# Altium PCB MB1364.PcbDoc (part 3 of 3)
Units mm, origin at the board's own origin, x right, y up, seen from the top; angles counter-clockwise.
Board outline 70 x 133.34 mm, 4 copper layers (Top Layer, Signal Layer 1, Signal Layer 3, Bottom Layer), stack 1.501 mm thick; 93 components, 195 nets, 473 pads, 282 vias.
Unrouted connection lines stored in the file: 23.
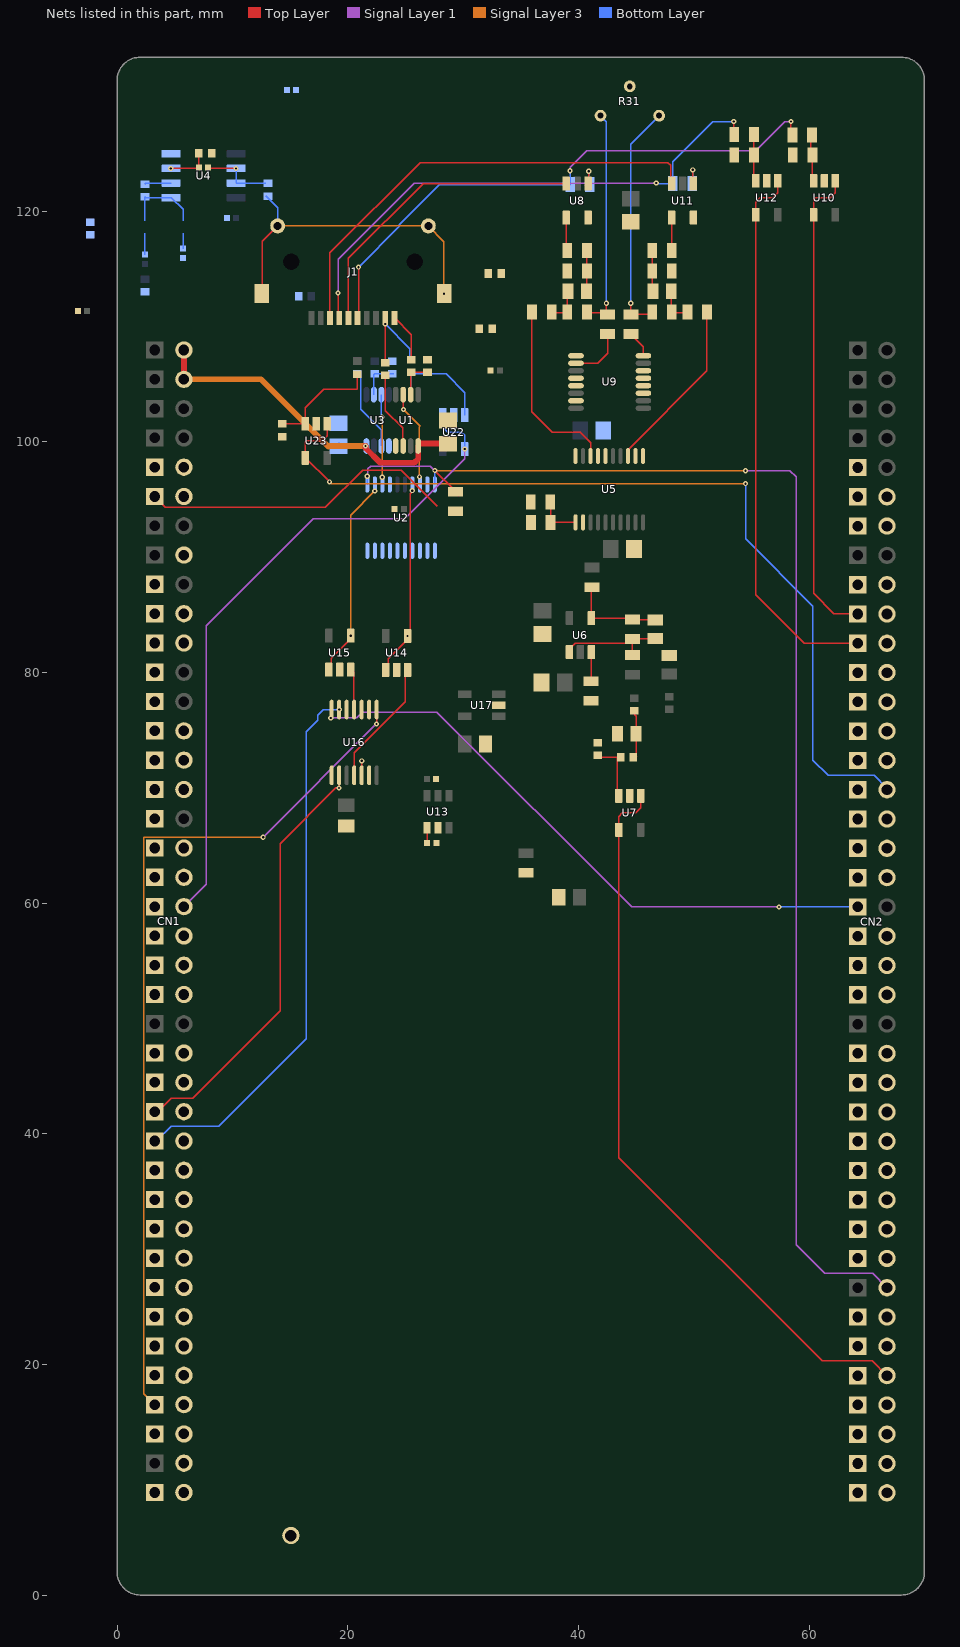
[diagram p4: the nets of this part, all layers, seen from the top]

## Via types
v1: diameter 0.45, hole 0.2, Top Layer to Bottom Layer, tented both sides, 280 vias
v2: diameter 1.27, hole 0.711, Top Layer to Bottom Layer, 1 vias
v3: diameter 0.45, hole 0.2, Top Layer to Bottom Layer, 1 vias

## Nets (pads, with @x,y where several pads share a name; then routed paths per layer and width w, separated by ;. In a path a pad name is that pad's centre, name@x,y a point inside that pad or via, vN(x,y) a via of type N, cw(c..) or ccw(c..) an arc to the next point about the centre after c; other vN are vias at no path point) (continued)
"Bottom In": U2.12 U15.1 U15.4 | length 17.2
  Top Layer w0.12: U15.1@18.354,80.237 18.57,80.453 18.57,81.228 20.254,82.912 v1(20.254,83.187)
  Signal Layer 3 w0.12: v1@20.233,83.187 20.233,93.635 v1(22.331,95.733)
"Bottom Sense Plate Force": J1.7 R37.1 R39.2 | length 46.7
  Top Layer w0.12: v1(19.156,112.903) 19.156,110.821 J1.7@19.249,110.728 ; v1(53.467,127.762) 53.467,126.658 R39.2@53.506,126.619
  Signal Layer 1 w0.12: v1(19.156,112.903) 19.156,115.803 25.781,122.428 v1(46.736,122.428)
  Bottom Layer w0.12: v1(46.736,122.428) 46.785,122.379 R37.1@48.172,122.379 48.172,124.296 51.638,127.762 v1(53.467,127.762)
"Bottom Sense Plate Sense": J1.8 U11.3 | length 40.2
  Top Layer w0.12: J1.8@18.449,110.728 18.449,116.387 26.268,124.206 47.752,124.206 48.006,123.952 48.006,122.445 U11.3@48.072,122.379
Bottom_In: R36.1 U5.3 | length 15.3
  Top Layer w0.12: U5.3@44.297,98.76 44.297,99.288 51.142,106.133 R36.1@51.142,111.252
DAC0_OUT: U14.3 U16.4 | length 11.1
  Top Layer w0.12: U16.4@20.549,71.078 20.549,73.024 24.965,77.441 24.965,79.995 U14.3@25.182,80.211
DAC1_OUT: U15.3 U16.11 | length 3.6
  Top Layer w0.12: U15.3@20.254,80.237 20.299,80.237 20.509,80.026 20.509,76.817 U16.11@20.549,76.778
DAC2_OUT: U16.5 | length 1.3
  Top Layer w0.12: U16.5@21.199,71.078 21.204,71.083 21.204,72.322 v1(21.209,72.328)
DAC3_OUT: U16.10
GND: C1.2 C2.1 C3.2 C4.1 C7.1 C7.2 C8.1 C10.2 C11.1 C12.2 C13.1 C14.1 C15.1 C18.1 C19.2 C20.1 C21.1 C22.1 C23.1 C25.1 C26.1 CN1.16 CN1.27 CN1.28 CN1.30 CN1.59 CN1.70 CN2.17 CN2.28 CN2.49 CN2.64 CN2.73 R1.1 R4.1 R5.2 R12.2 R13.2 R14.1 R23.1 R24.1 R31.2 R32.1 R33.1 R40.1 R41.1 R43.1 R45.1 TP2.1 U1.5 U2.1 U2.2 U2.3 U2.4 U2.5 U2.6 U2.7 U2.8 U2.9 U2.10 U2.14 U2.19 U3.5 U4.4 U5.2 U5.6 U5.7 U5.12 U7.2 U8.5 U9.5 U9.6 U9.9 U10.2 U11.5 U12.2 U13.2 U14.2 U15.2 U16.1 U16.6 U16.12 U17.2 U22.2 U23.2
Guard: J1.11 J1.12 J1.13 J1.14 R9.1 | length 29
  Top Layer w0.12: J1.12@12.544,112.838 12.573,112.867 12.573,117.367 J1.14@13.919,118.713
  Signal Layer 3 w0.12: J1.14@13.919,118.713 J1.13@26.979,118.713 28.333,117.359 v1(28.333,112.838)
  Bottom Layer w0.12: R9.1@12.903,121.319 13.919,120.303 J1.14@13.919,118.713
IOREF: CN1.20
NetC5_1: C5.1 R8.1 U4.1 | length 8.7
  Bottom Layer w0.12: C5.1@2.413,116.224 2.413,118.068 ; 2.413,119.168 R8.1@2.413,121.243 2.498,121.158 U4.1@4.668,121.158 4.699,121.158 5.715,120.142 5.715,119.168
NetC6_1: C6.1 R9.2 U4.6 U4.7 | length 6.3
  Top Layer w0.12: C6.1@7.893,123.563 7.999,123.669 8.028,123.698 v1(10.297,123.698)
  Bottom Layer w0.12: U4.6@10.318,123.698 U4.7@10.318,122.428 12.894,122.428 R9.2@12.903,122.419
NetC6_2: C6.2 R13.1 U4.3 | length 4
  Top Layer w0.12: v1(4.647,123.698) 6.958,123.698 7.093,123.563 7.095,123.565 R13.1@7.095,125.019
NetC8_2: C8.2 R10.1 | length 1.3
  Bottom Layer w0.12: C8.2@5.715,116.732 5.715,118.068
NetC9_1: C9.1 R15.2 R17.1 U6.4 | length 8.3
  Top Layer w0.12: R17.1@41.165,87.381 41.115,87.331 U6.4@41.115,84.706 44.54,84.706 R15.2@44.665,84.581 46.615,84.581 C9.1@46.665,84.531
NetC9_2: C9.2 R15.1 R18.2 U6.1 | length 9.5
  Top Layer w0.12: U6.1@39.215,81.756 39.215,82.031 39.72,82.536 44.32,82.536 R15.1@44.665,82.881 ; R18.2@44.704,81.495 44.665,81.534 R15.1@44.665,82.881 ; C9.2@46.665,82.931 44.715,82.931 R15.1@44.665,82.881
NetC11_2: C11.2 R19.1 R21.2 | length 3.8
  Top Layer w0.12: R19.1@44.831,76.366 44.996,76.201 C11.2@44.996,74.676 44.996,72.694 R21.2@45.046,72.644
NetC16_1: C16.1 R29.2 R32.2 | length 3.6
  Top Layer w0.12: C16.1@40.678,113.03 40.728,113.08 R32.2@40.728,114.808 R29.2@40.728,116.586
NetC16_2: C16.2 R25.1 R27.2 | length 3.1
  Top Layer w0.12: R25.1@37.884,111.181 39.184,111.181 39.034,111.331 C16.2@39.034,112.881
NetC17_1: C17.1 R38.2 R40.2 | length 3.6
  Top Layer w0.12: R38.2@46.394,116.586 R40.2@46.394,114.808 46.394,113.08 C17.1@46.444,113.03
NetC17_2: C17.2 R35.1 R36.2 | length 3.4
  Top Layer w0.12: C17.2@48.044,113.03 48.044,111.302 R35.1@48.094,111.252 48.094,111.181 49.184,111.181 R36.2@49.53,111.527
NetC19_1: C19.1 U13.1 | length 1.3
  Top Layer w0.12: U13.1@26.868,66.537 26.868,65.217 C19.1@26.88,65.205
NetLabel209: 
NetLabel213: U9.12
NetLabel214: U9.15
NetLabel215: U9.13
NetR1_2: R1.2 R2.1 U1.2 | length 3.3
  Top Layer w0.12: U1.2@25.45,104.079 25.45,105.947 R2.1@25.506,106.003 R1.2@26.903,106.003
NetR3_1: R3.1 U1.6 | length 6.8
  Top Layer w0.12: R3.1@23.255,105.749 23.255,102.682 24.744,101.193 24.744,99.685 U1.6@24.8,99.629
NetR4_2: R4.2 R6.1 U3.2 | length 3.5
  Bottom Layer w0.12: U3.2@22.26,104.079 22.26,105.805 R6.1@22.331,105.876 R4.2@23.855,105.876 R4.2@23.982,105.876
NetR7_1: R7.1 U3.6 | length 7.4
  Bottom Layer w0.12: R7.1@20.604,105.918 20.84,105.918 21.122,105.636 21.122,102.817 22.91,101.029 U3.6@22.91,99.629
NetR8_2: R8.2 R10.2 U4.2 | length 2.3
  Bottom Layer w0.12: R8.2@2.413,122.343 2.498,122.428 U4.2@4.668,122.428
NetR11_1: R11.1 R43.2 U22.3 | length 8.5
  Bottom Layer w0.12: 25.45,104.629 25.455,104.634 25.455,105.876 28.52,105.876 30.131,104.265 U22.3@30.131,102.313
NetR21_1: R21.1 R24.2 U7.3 | length 5.3
  Top Layer w0.12: R24.2@41.49,72.644 43.346,72.644 43.346,69.447 U7.3@43.5,69.293
NetR23_2: R23.2 U6.3 | length 2.6
  Top Layer w0.12: R23.2@41.08,79.407 R23.2@41.18,79.307 ; R23.2@41.115,79.331 U6.3@41.115,81.756
NetR26_2: R26.2 U8.1 | length 2.5
  Top Layer w0.12: U8.1@40.828,122.379 40.894,122.445 v1(40.894,123.454)
  Bottom Layer w0.12: R26.2@40.601,122.174 40.855,122.428 40.894,122.467 v1(40.894,123.454)
NetR27_1: R27.1 R30.1 R31.1 | length 19
  Top Layer w0.12: R27.1@40.884,111.181 R30.1@42.384,111.181 ; v1(42.418,112.014) 42.418,111.147 R30.1@42.534,111.031
  Bottom Layer w0.12: R31.1@41.91,128.27 42.418,127.762 v1(42.418,112.014)
NetR28_1: R28.1 R33.2 U10.3 | length 4.2
  Top Layer w0.12: R28.1@60.261,126.594 60.159,126.619 60.159,124.968 R33.2@60.286,124.841 60.286,122.717 U10.3@60.379,122.624
NetR29_1: R29.1 U8.4 | length 2.9
  Top Layer w0.12: U8.4@38.928,119.429 38.928,116.686 R29.1@39.028,116.586
NetR30_2: R30.2 U9.10 | length 4.8
  Top Layer w0.12: U9.10@39.784,106.806 41.659,106.806 42.534,107.681 R30.2@42.534,109.331
NetR31_3: R31.3 R34.1 R35.2 | length 20
  Top Layer w0.12: v1(44.534,112.014) R34.1@44.534,111.031 46.034,111.031 R35.2@46.184,111.181
  Bottom Layer w0.12: v1(44.534,112.014) 44.534,125.814 R31.3@46.99,128.27
NetR34_2: R34.2 U9.8 | length 2.3
  Top Layer w0.12: R34.2@44.534,109.331 45.634,108.231 U9.8@45.634,107.456
NetR37_2: R37.2 U11.1 | length 2.4
  Top Layer w0.12: v1(49.911,123.571) 49.911,122.44 U11.1@49.972,122.379
  Bottom Layer w0.12: R37.2@49.872,122.379 49.911,122.418 v1(49.911,123.571)
NetR38_1: R38.1 U11.4 | length 2.9
  Top Layer w0.12: U11.4@48.072,119.429 48.072,116.608 R38.1@48.094,116.586
NetR39_1: R39.1 R41.2 U12.3 | length 4.1
  Top Layer w0.12: R39.1@55.206,126.619 R41.2@55.206,124.841 55.206,122.797 U12.3@55.379,122.624
NetR42_1: R42.1 U16.9
NetR44_1: R44.1 R45.2 U23.3 | length 9.9
  Top Layer w0.12: R45.2@14.3,101.54 14.311,101.551 U23.3@16.301,101.551 16.301,102.936 17.928,104.563 20.807,104.563 R44.1@20.807,105.901
NetU1_3: U1.3 U2.18 | length 7.8
  Top Layer w0.12: U1.3@24.8,104.079 24.8,102.814 v1(24.82,102.794)
  Signal Layer 3 w0.12: v1(24.82,102.794) 26.268,101.346 26.213,101.291 v1(26.213,96.952)
NetU2_13: U2.13 U3.3 | length 7.2
  Signal Layer 3 w0.12: v1(22.966,102.133) 22.987,102.112 v1(22.987,96.926)
  Bottom Layer w0.12: U3.3@22.91,104.079 22.91,102.189 v1(22.966,102.133)
NRST: CN1.22
PA0: CN1.36
PA1: CN1.38
PA2: CN2.43
PA3: CN2.45
PA4: CN1.40 U22.1 U22.4 | length 58.8
  Signal Layer 1 w0.12: CN1.40@5.786,59.689 7.735,61.638 7.735,84.062 11.151,87.478 16.993,93.32 24.943,93.32 30.131,98.508 v1(30.131,99.363)
  Bottom Layer w0.12: U22.1@28.231,102.313 28.231,101.288 28.681,100.838 29.849,100.838 30.131,100.556 v1(30.131,99.363)
PA5: CN2.19 U10.1 U10.4 | length 41.9
  Top Layer w0.12: U10.1@62.279,122.624 62.279,121.599 61.838,121.158 60.579,121.158 60.379,120.958 U10.4@60.379,119.674 60.379,86.839 62.155,85.064 CN2.19@64.206,85.064
PA6: CN2.21 U12.1 U12.4 | length 47.9
  Top Layer w0.12: U12.1@57.279,122.624 57.279,121.599 56.829,121.149 55.744,121.149 55.379,120.784 U12.4@55.379,119.674 55.379,86.734 59.589,82.524 CN2.21@64.206,82.524
PA7: CN2.23
PA8: CN2.31
PA9: CN2.29
PA10: CN2.41
PA11: CN2.22
PA12: CN2.20
PA13: CN1.21
PA14: CN1.23
PA15: CN1.25
PB0: CN1.42
PB1: CN2.32 U23.1 U23.4 | length 77.6
  Top Layer w0.12: U23.4@16.301,98.601 16.301,99.939 16.438,100.076 17.751,100.076 18.201,100.526 U23.1@18.201,101.551 ; U23.4@16.322,98.613 v1(18.415,96.52)
  Signal Layer 3 w0.12: v1(18.415,96.52) 18.567,96.368 v1(54.483,96.368)
  Bottom Layer w0.12: v1(54.483,96.368) 54.483,91.567 60.325,85.725 60.325,72.39 61.646,71.069 65.634,71.069 66.746,69.957 CN2.32@66.746,69.824
PB2: CN2.30
PB3: CN2.39 U16.14 | length 52.9
  Signal Layer 1 w0.12: v1(18.517,76.048) 20.777,76.048 21.285,76.556 27.711,76.556 44.603,59.664 v1(57.379,59.664)
  Bottom Layer w0.12: v1(57.379,59.664) CN2.39@64.206,59.664
PB4: CN2.35
PB5: CN2.37
PB6: CN2.25
PB7: CN1.29
PB8: CN2.11
PB9: CN2.13
PB10: CN2.33
PB11: CN2.26
PB12: CN2.24
PB13: CN2.38
PB14: CN2.36
PB15: CN2.34
PC0: CN1.46
PC1: CN1.44
PC2: CN1.43
PC2_C: U9.4
PC3: CN1.45
PC3_C: U9.3
PC4: CN2.42
PC5: CN2.14
PC6: CN2.12
PC7: CN2.27
PC9: CN2.9
PC10: CN1.9
PC11: CN1.10
PC12: CN1.11 | length 27.5
  Top Layer w0.12: CN1.11@3.246,95.249 4.19,94.305 18.047,94.305 21.273,97.531 24.626,97.531 27.75,94.407
PC13: CN1.31
PC14: CN1.33
PC15: CN1.35
PD0: CN1.67
PD1: CN1.65
PD2: CN1.12
PD3: CN1.50
PD4: CN1.49
PD5: CN1.51
PD6: CN1.53 U16.2 | length 37.2
  Top Layer w0.12: CN1.53@3.246,41.909 3.529,41.909 4.699,43.078 6.553,43.078 14.122,50.648 14.122,65.151 18.949,69.978 v1(19.228,69.978) 19.249,69.998 U16.2@19.249,71.078
PD7: CN1.55 U16.13 | length 47.4
  Bottom Layer w0.12: CN1.55@3.246,39.369 3.402,39.369 4.674,40.64 8.788,40.64 16.383,48.235 16.383,74.854 17.374,75.844 17.374,76.302 17.85,76.778 v1(19.249,76.778)
PD8: CN2.18
PD9: CN1.79
PD10: CN2.75
PD11: CN2.55
PD12: CN2.53
PD13: CN2.51
PD14: CN2.56
PD15: CN2.58
PE0: CN2.74
PE1: CN1.71
PE2: CN1.56
PE3: CN1.57
PE4: CN1.58
PE5: CN1.60
PE6: CN1.72
PE7: CN2.54
PE8: CN2.50
PE9: CN2.62 R20.1
PE10: CN2.57
PE11: CN2.66 R22.1
PE12: CN2.59
PE13: CN2.65
PE13: R5.1 U2.11 U2.20 | length 119.3
  Top Layer w0.12: v1(27.548,97.502) 29.316,95.734 R5.1@29.316,95.668 R5.1@29.681,95.303
  Signal Layer 1 w0.12: v1(21.692,97.003) 21.747,97.058 21.747,97.663 21.975,97.892 27.158,97.892 v1(27.548,97.502) ; v1(54.483,97.485) 58.311,97.485 58.327,97.502 58.877,96.952 58.877,30.353 61.341,27.889 65.501,27.889 66.746,26.644
  Signal Layer 3 w0.12: v1(27.548,97.502) 27.565,97.485 v1(54.483,97.485)
  Bottom Layer w0.12: v1(21.692,97.003) 21.692,96.325 U2.11@21.706,96.31 ; U2.20@27.548,96.302 v1(27.548,97.502)
PE14: CN2.61
PE15: CN2.63
PF0: CN1.63
PF1: CN1.61
PF2: CN1.62
PF3: CN2.68
PF4: CN2.46
PF5: CN2.44
PF6: CN1.17
PF7: CN1.19
PF8: CN1.64
PF9: CN1.66
PF10: CN2.52
PF11: CN2.72 U7.1 U7.4 | length 63.9
  Top Layer w0.12: U7.1@45.4,69.293 45.4,68.268 44.95,67.818 43.815,67.818 43.5,67.503 U7.4@43.5,66.343 43.5,37.932 61.138,20.295 65.481,20.295 66.746,19.03 CN2.72@66.746,19.024
PF12: CN2.69
PF13: CN2.67
PF14: CN2.60
PF15: CN2.70
PG0: CN1.69
PG1: CN1.68
PG2: CN1.52
PG3: CN1.54
PG4: CN2.79
PG5: CN2.78
PG6: CN2.80
PG7: CN2.77
PG8: CN2.76
PG9: CN1.73 U16.8 | length 75.1
  Top Layer w0.12: v1(22.479,75.528) 22.489,75.537 22.489,76.768 U16.8@22.499,76.778
  Signal Layer 1 w0.12: v3(12.656,65.705) v1(22.479,75.528)
  Signal Layer 3 w0.12: CN1.73@3.246,16.509 2.299,17.455 2.299,65.705 v3(12.656,65.705)
PG10: CN1.76
PG11: CN1.80
PG12: CN1.75
PG13: CN1.78
PG14: CN2.71
PG15: CN1.74
PH0: CN1.37
PH1: CN1.39
PWM65KHz: R20.2 R22.2 U5.1 U5.10 U5.11 | length 3.8
  Top Layer w0.12: R20.2@37.578,94.59 R22.2@37.578,92.989 37.599,93.01 U5.11@39.747,93.01
"Top Force Plate Force": J1.2 R3.2 R11.2 | length 8.6
  Top Layer w0.12: v1(23.249,110.211) J1.2@23.249,110.728 23.255,110.722 R3.2@23.255,106.849
  Bottom Layer w0.12: v1(23.249,110.211) 25.379,108.081 25.379,106.976 25.455,106.976
"Top Force Plate Sense": J1.1 R2.2 | length 4.2
  Top Layer w0.12: J1.1@24.049,110.728 25.506,109.271 R2.2@25.506,107.103
"Top In": U2.17 U14.1 U14.4 | length 16.5
  Top Layer w0.12: U14.1@23.282,80.211 23.498,80.428 23.498,81.203 25.182,82.886 v1(25.182,83.161) 25.403,83.383 25.403,95.49 25.582,95.669 v1(25.582,95.758)
"Top Sense Plate Force": J1.5 R26.1 R28.2 | length 49.3
  Top Layer w0.12: J1.5@20.849,110.728 20.93,110.809 v1(20.93,115.138) ; R28.2@58.42,126.658 v1(58.42,127.762)
  Signal Layer 1 w0.12: v1(39.268,123.495) 39.268,123.798 40.706,125.235 55.35,125.235 57.877,127.762 v1(58.42,127.762)
  Bottom Layer w0.12: v1(20.93,115.138) 24.466,118.675 24.466,118.827 27.94,122.301 R26.1@39.282,122.301 39.268,122.315 v1(39.268,123.495)
"Top Sense Plate Sense": J1.6 U8.3 | length 26.7
  Top Layer w0.12: J1.6@20.049,110.728 20.049,115.907 26.521,122.379 U8.3@38.928,122.379
Top_In: R25.2 U5.8 | length 16
  Top Layer w0.12: R25.2@35.98,111.252 35.941,111.213 35.941,102.616 37.719,100.838 40.132,100.838 41.047,99.923 U5.8@41.047,98.76
VBAT: CN1.41
VIN: CN1.32
ZSupply: C1.1 C3.1 CN1.2 CN1.4 U1.8 U3.8 | length 32.6
  Top Layer w0.12: U1.8@26.1,99.629 U1.8@26.309,99.838
  Top Layer w0.5: CN1.4@5.786,105.409 CN1.2@5.786,107.949 ; v1(21.539,99.629) 21.539,99.445 22.814,98.171 25.76,98.171 26.1,98.511 U1.8@26.1,99.629 ; U1.8@26.309,99.838 C1.1@28.681,99.838 C1.1@28.681,99.538
  Signal Layer 3 w0.5: CN1.4@5.786,105.409 12.473,105.409 18.313,99.568 ; 18.374,99.629 v1(21.539,99.629)
  Bottom Layer w0.12: U3.8@21.387,99.629 v1(21.539,99.629) U3.8@21.61,99.629
  Bottom Layer w0.5: C3.1@19.181,99.609 19.24,99.665 21.177,99.629 U3.8@21.387,99.629
pads on no net: CN1.18 CN1.34 CN1.47 CN1.48 CN1.77 CN2.10 CN2.15 CN2.47 CN2.48 J1.9 J1.15 J1.16 U1.1 U1.4 U1.7 U2.15 U3.1 U3.4 U3.7 U5.15 U5.17 U5.18 U5.19 U5.20 U9.1 U9.2 U9.7 U9.14 U9.16
copper on no net: | length 1692.4
  Top Layer w0.12: 18.676,73.653 19.149,73.653 19.174,73.678 ; 35.853,94.793 35.853,96.178 38.435,98.76 39.747,98.76 39.747,97.032 39.817,96.962 45.146,96.962 45.597,97.413 45.597,98.76 47.38,96.977 53.467,90.89 53.467,70.104 61.341,62.23 61.341,33.934 62.179,33.096 65.126,33.096 66.498,31.724 66.746,31.724
  Top Layer w0.45: v1(14.328,0.629) v1(12.591,0.629) v1(10.866,0.629) v1(9.104,0.629) v1(7.366,0.629) v1(5.641,0.629) v1(3.828,0.629) v1(2.091,0.629) cw(c2.091,2.079) 0.641,2.079 v1(0.641,2.616) v1(0.641,4.354) v1(0.641,6.079) v1(0.641,7.804) v1(0.641,9.541) v1(0.641,11.266) v1(0.641,13.029) v1(0.641,14.766) v1(0.641,16.491) v1(0.641,18.304) v1(0.641,20.041) v1(0.641,21.766) v1(0.641,23.504) v1(0.641,25.241) v1(0.641,26.966) v1(0.641,28.654) v1(0.641,30.391) v1(0.641,32.116) v1(0.641,33.879) v1(0.641,35.616) v1(0.641,37.341) v1(0.641,39.154) v1(0.641,40.891) v1(0.641,42.616) v1(0.641,44.354) v1(0.641,46.091) v1(0.641,47.816) v1(0.641,49.566) v1(0.641,51.304) v1(0.641,53.029) v1(0.641,54.791) v1(0.641,56.529) v1(0.641,58.254) v1(0.641,60.066) v1(0.641,61.804) v1(0.641,63.529) v1(0.641,65.266) v1(0.641,67.004) v1(0.641,68.729) v1(0.641,70.404) v1(0.641,72.141) v1(0.641,73.866) v1(0.641,75.629) v1(0.641,77.366) v1(0.641,79.091) v1(0.641,80.904) v1(0.641,82.641) v1(0.641,84.366) v1(0.641,86.104) v1(0.641,87.841) v1(0.641,89.566) v1(0.641,91.279) v1(0.641,93.016) v1(0.641,94.741) v1(0.641,96.504) v1(0.641,98.241) v1(0.641,99.966) v1(0.641,101.779) v1(0.641,103.516) v1(0.641,105.241) v1(0.641,106.979) v1(0.641,108.716) v1(0.641,110.441) v1(0.641,112.179) v1(0.641,113.916) v1(0.641,115.641) v1(0.641,117.404) v1(0.641,119.141) v1(0.641,120.866) v1(0.641,122.679) v1(0.641,124.416) v1(0.641,126.141) v1(0.641,127.879) v1(0.641,129.616) 0.641,131.294 cw(c2.062,131.294) 2.062,132.715 v1(2.178,132.716) v1(7.741,132.716) v1(12.966,132.716) v1(18.241,132.716) v1(21.716,132.716) v1(25.191,132.716) v1(28.654,132.716) v1(33.879,132.716) v1(37.429,132.716) 45.441,132.715 ; v1@14.341,0.635 v1(16.154,0.635) v1(17.879,0.635) v1(19.616,0.635) v1(21.379,0.635) v1(23.104,0.635) v1(24.841,0.635) ; v1@24.857,0.635 v1(26.669,0.635) v1(28.394,0.635) v1(30.132,0.635) v1(31.894,0.635) v1(33.619,0.635) v1(35.357,0.635) ; v1@35.372,0.635 v1(37.185,0.635) v1(38.91,0.635) v1(40.647,0.635) v1(42.41,0.635) v1(44.135,0.635) 45.872,0.635 ; 44.979,0.625 v1(46.791,0.625) v1(48.516,0.625) v1(50.253,0.625) v1(52.016,0.625) v1(53.741,0.625) v1(55.479,0.625) v1(57.216,0.625) v1(58.941,0.625) v1(60.679,0.625) v1(62.491,0.625) v1(64.216,0.625) v1(65.953,0.625) v1(67.716,0.625) 67.938,0.625 ccw(c67.938,2.053) v1(69.366,2.053) v1(69.366,3.778) v1(69.366,5.515) v1(69.366,7.253) v1(69.366,8.978) v1(69.366,10.715) v1(69.366,12.528) v1(69.366,14.253) v1(69.366,15.99) v1(69.366,17.753) v1(69.366,19.478) v1(69.366,21.215) v1(69.366,22.979) v1(69.366,24.704) v1(69.366,26.441) v1(69.366,28.179) v1(69.366,29.904) v1(69.366,31.641) v1(69.366,33.454) v1(69.366,35.179) v1(69.366,36.916) v1(69.366,38.679) v1(69.366,40.404) v1(69.366,42.141) v1(69.366,43.954) v1(69.366,45.679) v1(69.366,47.416) v1(69.366,49.154) v1(69.366,50.879) v1(69.366,52.616) v1(69.366,54.429) v1(69.366,56.154) v1(69.366,57.891) v1(69.366,59.654) v1(69.366,61.379) v1(69.366,63.116) v1(69.366,64.766) v1(69.366,66.491) v1(69.366,68.229) v1(69.366,69.966) v1(69.366,71.691) v1(69.366,73.429) v1(69.366,75.241) v1(69.366,76.966) v1(69.366,78.704) v1(69.366,80.466) v1(69.366,82.191) v1(69.366,83.929) v1(69.366,85.654) v1(69.366,87.379) v1(69.366,89.116) v1(69.366,90.854) v1(69.366,92.579) v1(69.366,94.316) v1(69.366,96.129) v1(69.366,97.854) v1(69.366,99.591) v1(69.366,101.354) v1(69.366,103.079) v1(69.366,104.816) v1(69.366,106.554) v1(69.366,108.279) v1(69.366,110.016) v1(69.366,111.754) v1(69.366,113.479) v1(69.366,115.216) v1(69.366,117.029) v1(69.366,118.754) v1(69.366,120.491) v1(69.366,122.254) v1(69.366,123.979) v1(69.366,125.716) v1(69.366,127.454) v1(69.366,129.179) v1(69.366,130.916) 69.366,131.269 69.375,131.278 ccw(c67.949,131.278) v1(67.949,132.704) v1(66.212,132.704) v1(64.399,132.704) v1(62.674,132.704) v1(60.937,132.704) v1(59.174,132.704) v1(57.449,132.704) v1(55.712,132.704) v1(53.729,132.704) 52.352,132.704 52.341,132.715 45.441,132.715 ; 45.466,132.69 45.441,132.715
  Signal Layer 1 w0.12: 38.024,133.706 38.227,133.706
  Signal Layer 1 w0.45: v1(14.328,0.629) v1(12.591,0.629) v1(10.866,0.629) v1(9.104,0.629) v1(7.366,0.629) v1(5.641,0.629) v1(3.828,0.629) v1(2.091,0.629) cw(c2.091,2.079) 0.641,2.079 v1(0.641,2.616) v1(0.641,4.354) v1(0.641,6.079) v1(0.641,7.804) v1(0.641,9.541) v1(0.641,11.266) v1(0.641,13.029) v1(0.641,14.766) v1(0.641,16.491) v1(0.641,18.304) v1(0.641,20.041) v1(0.641,21.766) v1(0.641,23.504) v1(0.641,25.241) v1(0.641,26.966) v1(0.641,28.654) v1(0.641,30.391) v1(0.641,32.116) v1(0.641,33.879) v1(0.641,35.616) v1(0.641,37.341) v1(0.641,39.154) v1(0.641,40.891) v1(0.641,42.616) v1(0.641,44.354) v1(0.641,46.091) v1(0.641,47.816) v1(0.641,49.566) v1(0.641,51.304) v1(0.641,53.029) v1(0.641,54.791) v1(0.641,56.529) v1(0.641,58.254) v1(0.641,60.066) v1(0.641,61.804) v1(0.641,63.529) v1(0.641,65.266) v1(0.641,67.004) v1(0.641,68.729) v1(0.641,70.404) v1(0.641,72.141) v1(0.641,73.866) v1(0.641,75.629) v1(0.641,77.366) v1(0.641,79.091) v1(0.641,80.904) v1(0.641,82.641) v1(0.641,84.366) v1(0.641,86.104) v1(0.641,87.841) v1(0.641,89.566) v1(0.641,91.279) v1(0.641,93.016) v1(0.641,94.741) v1(0.641,96.504) v1(0.641,98.241) v1(0.641,99.966) v1(0.641,101.779) v1(0.641,103.516) v1(0.641,105.241) v1(0.641,106.979) v1(0.641,108.716) v1(0.641,110.441) v1(0.641,112.179) v1(0.641,113.916) v1(0.641,115.641) v1(0.641,117.404) v1(0.641,119.141) v1(0.641,120.866) v1(0.641,122.679) v1(0.641,124.416) v1(0.641,126.141) v1(0.641,127.879) v1(0.641,129.616) 0.641,131.294 cw(c2.062,131.294) 2.062,132.715 v1(9.504,132.716) v1(14.779,132.716) v1(25.191,132.716) v1(33.879,132.716) v1(37.429,132.716) v1(39.153,132.716) 45.441,132.715 ; v1@14.341,0.635 v1(16.154,0.635) v1(17.879,0.635) v1(19.616,0.635) v1(21.379,0.635) v1(23.104,0.635) v1(24.841,0.635) ; v1@24.857,0.635 v1(26.669,0.635) v1(28.394,0.635) v1(30.132,0.635) v1(31.894,0.635) v1(33.619,0.635) v1(35.357,0.635) ; v1@35.372,0.635 v1(37.185,0.635) v1(38.91,0.635) v1(40.647,0.635) v1(42.41,0.635) v1(44.135,0.635) 45.872,0.635 ; 44.979,0.625 v1(46.791,0.625) v1(48.516,0.625) v1(50.253,0.625) v1(52.016,0.625) v1(53.741,0.625) v1(55.479,0.625) v1(57.216,0.625) v1(58.941,0.625) v1(60.679,0.625) v1(62.491,0.625) v1(64.216,0.625) v1(65.953,0.625) v1(67.716,0.625) 67.938,0.625 ccw(c67.938,2.053) v1(69.366,2.053) v1(69.366,3.778) v1(69.366,5.515) 69.366,5.552 69.375,5.561 69.375,12.528 69.375,14.253 69.375,26.441 69.375,29.904 69.375,36.916 69.375,42.141 69.375,49.154 69.375,50.879 69.375,63.116 69.375,71.691 69.375,75.241 69.375,82.191 69.375,89.116 69.375,94.316 69.375,97.854 69.375,103.079 69.375,106.554 69.375,113.479 69.375,120.491 69.375,129.179 69.375,131.278 ccw(c67.949,131.278) v1(67.949,132.704) v1(66.212,132.704) v1(64.399,132.704) v1(62.674,132.704) v1(60.937,132.704) v1(59.174,132.704) v1(57.449,132.704) v1(55.712,132.704) v1(53.729,132.704) 52.352,132.704 52.341,132.715 45.441,132.715 ; 45.466,132.69 45.441,132.715
  Signal Layer 3 w0.45: v1(14.328,0.629) v1(12.591,0.629) v1(10.866,0.629) v1(9.104,0.629) v1(7.366,0.629) v1(5.641,0.629) v1(3.828,0.629) v1(2.091,0.629) cw(c2.091,2.079) 0.641,2.079 v1(0.641,2.616) v1(0.641,4.354) v1(0.641,6.079) v1(0.641,7.804) v1(0.641,9.541) v1(0.641,11.266) v1(0.641,13.029) v1(0.641,14.766) v1(0.641,16.491) v1(0.641,18.304) v1(0.641,20.041) v1(0.641,21.766) v1(0.641,23.504) v1(0.641,25.241) v1(0.641,26.966) v1(0.641,28.654) v1(0.641,30.391) v1(0.641,32.116) v1(0.641,33.879) v1(0.641,35.616) v1(0.641,37.341) v1(0.641,39.154) v1(0.641,40.891) v1(0.641,42.616) v1(0.641,44.354) v1(0.641,46.091) v1(0.641,47.816) v1(0.641,49.566) v1(0.641,51.304) v1(0.641,53.029) v1(0.641,54.791) v1(0.641,56.529) v1(0.641,58.254) v1(0.641,60.066) v1(0.641,61.804) v1(0.641,63.529) v1(0.641,65.266) v1(0.641,67.004) v1(0.641,68.729) v1(0.641,70.404) v1(0.641,72.141) v1(0.641,73.866) v1(0.641,75.629) v1(0.641,77.366) v1(0.641,79.091) v1(0.641,80.904) v1(0.641,82.641) v1(0.641,84.366) v1(0.641,86.104) v1(0.641,87.841) v1(0.641,89.566) v1(0.641,91.279) v1(0.641,93.016) v1(0.641,94.741) v1(0.641,96.504) v1(0.641,98.241) v1(0.641,99.966) v1(0.641,101.779) v1(0.641,103.516) v1(0.641,105.241) v1(0.641,106.979) v1(0.641,108.716) v1(0.641,110.441) v1(0.641,112.179) v1(0.641,113.916) v1(0.641,115.641) v1(0.641,117.404) v1(0.641,119.141) v1(0.641,120.866) v1(0.641,122.679) v1(0.641,124.416) v1(0.641,126.141) v1(0.641,127.879) v1(0.641,129.616) 0.641,131.294 cw(c2.062,131.294) 2.062,132.715 v1(7.741,132.716) v1(19.979,132.716) v1(25.191,132.716) v1(28.654,132.716) v1(32.153,132.716) v1(35.691,132.716) 45.441,132.715 ; v1@14.341,0.635 v1(16.154,0.635) v1(17.879,0.635) v1(19.616,0.635) v1(21.379,0.635) v1(23.104,0.635) v1(24.841,0.635) ; v1@24.857,0.635 v1(26.669,0.635) v1(28.394,0.635) v1(30.132,0.635) v1(31.894,0.635) v1(33.619,0.635) v1(35.357,0.635) ; v1@35.372,0.635 v1(37.185,0.635) v1(38.91,0.635) v1(40.647,0.635) v1(42.41,0.635) v1(44.135,0.635) 45.872,0.635 ; 44.979,0.625 v1(46.791,0.625) v1(48.516,0.625) v1(50.253,0.625) v1(52.016,0.625) 53.691,0.625 v1(53.741,0.625) v1(55.479,0.625) v1(57.216,0.625) v1(58.941,0.625) v1(60.679,0.625) v1(62.491,0.625) v1(64.216,0.625) v1(65.953,0.625) v1(67.716,0.625) 67.938,0.625 ccw(c67.938,2.053) v1(69.366,2.053) v1(69.366,3.778) v1(69.366,5.515) 69.366,5.552 69.375,5.561 69.375,10.715 69.375,15.99 69.375,21.215 69.375,28.179 69.375,31.641 69.375,36.916 69.375,42.141 69.375,45.679 69.375,50.879 69.375,56.154 69.375,59.654 69.375,64.766 69.375,68.229 69.375,73.429 69.375,82.191 69.375,87.379 69.375,92.579 69.375,97.854 69.375,106.554 69.375,111.754 69.375,117.029 69.375,120.491 69.375,129.179 69.375,131.278 ccw(c67.949,131.278) v1(67.949,132.704) v1(66.212,132.704) v1(64.399,132.704) v1(62.674,132.704) v1(60.937,132.704) v1(59.174,132.704) v1(57.449,132.704) v1(55.712,132.704) v1(53.729,132.704) 52.352,132.704 52.341,132.715 45.441,132.715 ; 45.466,132.69 45.441,132.715
  Bottom Layer w0.45: v1(14.328,0.629) v1(12.591,0.629) v1(10.866,0.629) v1(9.104,0.629) v1(7.366,0.629) v1(5.641,0.629) v1(3.828,0.629) v1(2.091,0.629) cw(c2.091,2.079) 0.641,2.079 v1(0.641,2.616) v1(0.641,4.354) v1(0.641,6.079) v1(0.641,7.804) v1(0.641,9.541) v1(0.641,11.266) v1(0.641,13.029) v1(0.641,14.766) v1(0.641,16.491) v1(0.641,18.304) v1(0.641,20.041) v1(0.641,21.766) v1(0.641,23.504) v1(0.641,25.241) v1(0.641,26.966) v1(0.641,28.654) v1(0.641,30.391) v1(0.641,32.116) v1(0.641,33.879) v1(0.641,35.616) v1(0.641,37.341) v1(0.641,39.154) v1(0.641,40.891) v1(0.641,42.616) v1(0.641,44.354) v1(0.641,46.091) v1(0.641,47.816) v1(0.641,49.566) v1(0.641,51.304) v1(0.641,53.029) v1(0.641,54.791) v1(0.641,56.529) v1(0.641,58.254) v1(0.641,60.066) v1(0.641,61.804) v1(0.641,63.529) v1(0.641,65.266) v1(0.641,67.004) v1(0.641,68.729) v1(0.641,70.404) v1(0.641,72.141) v1(0.641,73.866) v1(0.641,75.629) v1(0.641,77.366) v1(0.641,79.091) v1(0.641,80.904) v1(0.641,82.641) v1(0.641,84.366) v1(0.641,86.104) v1(0.641,87.841) v1(0.641,89.566) v1(0.641,91.279) v1(0.641,93.016) v1(0.641,94.741) v1(0.641,96.504) v1(0.641,98.241) v1(0.641,99.966) v1(0.641,101.779) v1(0.641,103.516) v1(0.641,105.241) v1(0.641,106.979) v1(0.641,108.716) v1(0.641,110.441) v1(0.641,112.179) v1(0.641,113.916) v1(0.641,115.641) v1(0.641,117.404) v1(0.641,119.141) v1(0.641,120.866) v1(0.641,122.679) v1(0.641,124.416) v1(0.641,126.141) v1(0.641,127.879) v1(0.641,129.616) 0.641,131.294 cw(c2.062,131.294) 2.062,132.715 v1(9.504,132.716) v1(14.779,132.716) v1(18.241,132.716) v1(25.191,132.716) v1(28.654,132.716) v1(37.429,132.716) v1(44.354,132.716) 45.441,132.715 ; v1@14.341,0.635 v1(16.154,0.635) v1(17.879,0.635) v1(19.616,0.635) v1(21.379,0.635) v1(23.104,0.635) v1(24.841,0.635) ; v1@24.857,0.635 v1(26.669,0.635) v1(28.394,0.635) v1(30.132,0.635) v1(31.894,0.635) v1(33.619,0.635) v1(35.357,0.635) ; v1@35.372,0.635 v1(37.185,0.635) v1(38.91,0.635) v1(40.647,0.635) v1(42.41,0.635) v1(44.135,0.635) 45.872,0.635 ; 44.979,0.625 v1(46.791,0.625) v1(48.516,0.625) v1(50.253,0.625) v1(52.016,0.625) v1(53.741,0.625) v1(55.479,0.625) ; 45.466,132.69 45.441,132.715 ; v1(57.216,0.625) v1(58.941,0.625) v1(60.679,0.625) v1(62.491,0.625) v1(64.216,0.625) v1(65.953,0.625) v1(67.716,0.625) 67.938,0.625 ccw(c67.938,2.053) v1(69.366,2.053) v1(69.366,3.778) v1(69.366,5.515) 69.366,5.552 69.375,5.561 69.375,12.528 69.375,15.99 69.375,22.979 69.375,28.179 69.375,35.179 69.375,40.404 69.375,50.879 69.375,59.654 69.375,64.766 69.375,68.229 69.375,71.691 69.375,73.429 69.375,78.704 69.375,83.929 69.375,85.654 69.375,97.854 69.375,103.079 69.375,106.554 69.375,111.754 69.375,117.029 69.375,120.491 69.375,125.716 69.375,131.278 ccw(c67.949,131.278) v1(67.949,132.704) v1(66.212,132.704) v1(64.399,132.704) v1(62.674,132.704) v1(60.937,132.704) v1(59.174,132.704) v1(57.449,132.704) v1(55.712,132.704) v1(53.729,132.704) 52.352,132.704 52.341,132.715 45.441,132.715
  other v1: 0.641,131.341 4.279,132.716 6.016,132.716 11.241,132.716 16.516,132.716 23.441,132.716 26.929,132.716 30.416,132.716 40.891,132.716 42.629,132.716

## Polygon pours and split planes (outlines as drawn)
GND on Top Layer "NONET_L01_P114" (solid, remove dead copper, shelved, pour order 114): 1.574,133.34 0.112,131.879 0.112,107.629 20.162,107.629 15.412,107.629 0.112,107.629 0.112,1.629 1.612,0.129 35.362,0.129 35.621,0.129 35.916,0.129 53.365,0.129 53.365,0 68.233,0 69.862,1.629 69.862,108.788 69.862,131.879 68.401,133.34
GND on Signal Layer 1 "NONET_L02_P020" (solid, remove dead copper, shelved, pour order 20): 35.266,0 37.744,0 69.037,0 69.416,0.379 70,0.963 70,132.345 69.005,133.34 68,133.34 -0.034,133.379 -0.034,0.929 0.895,0
GND on Bottom Layer "NONET_L04_P118" (solid, remove dead copper, shelved, pour order 118): 1.599,133.289 0.138,131.828 0.138,107.578 20.188,107.578 15.438,107.578 0.138,107.578 0.138,1.578 1.638,0.078 35.388,0.078 35.647,0.078 35.941,0.078 53.39,0.078 53.39,-0.051 68.259,-0.051 69.888,1.578 69.888,108.737 69.888,131.828 68.427,133.289

## Keep-outs
Keep-Out Layer:
  lines w0.127: -0.004,1.999 ccw(c1.996,1.999) 1.996,-0.001

## Other copper
Top Layer:
  text "1" at 67.749,116.911 h2 r90
Signal Layer 1:
  text "2" at 67.749,118.161 h2 r90
Signal Layer 3:
  text "4" at 67.749,121.911 h2 r90
Bottom Layer:
  text "6" at 67.749,124.911 h2 r90
Multi-Layer:
  pour cut-out: 66.131,116.677 68.131,116.677 68.131,125.177 66.131,125.177

## Silkscreen, mask and mechanical layers (free items; w line width, h text height)
Top Overlay:
  text "GND" at 69.125,126.8 h1.5 r90
  text "GND" at 18.212,4.877 h1
Bottom Overlay:
  region: 9.5,94 9.5,32 14.5,32 14.5,94
  region: 55.356,75.495 55.356,31.495 60.356,31.495 60.356,75.495
  text "GND" at 68.45,126.875 h1.5 r270
  text "GND" at 0.625,126.775 h1.5 r270
  text "CN2" at 66.015,110.846 h1.5
  text "CN1" at 5.664,109.982 h1.5
  text "PC8" at 69.591,102.183 h1.2 r45
  text "PC11" at 9.5,101 h1.2
  text "PC10" at 1.766,100.979 h1.2 r315
  text "PC9" at 62.961,100.938 h1.2
  text "PC6" at 69.743,99.872 h1.2 r45
  text "E5V" at 3.008,99.435 h1.2
  text "PC12" at 1.791,98.579 h1.2 r315
  text "PD2" at 9,98.5 h1.2
  text "PB8" at 62.961,98.398 h1.2
  text "PC5" at 69.769,97.23 h1.2 r45
  text "3V3" at 1.866,96.504 h1.2 r315
  text "PB9" at 62.961,95.858 h1.2
  text "VDD" at 8.5,95 h1.2 r315
  text "U5V" at 69.667,94.563 h1.2 r45
  text "GND" at 9,93.5 h1.2
  text "BT0" at 1.595,93.318 h1.2 r315
  text "VREF+" at 62.69,92.664 h1.2 r315
  text "PD8" at 69.667,92.099 h1.2 r45
  text "NC" at 8.391,91.054 h1.2
  text "PF6" at 1.671,90.778 h1.2 r315
  text "GND" at 62.961,90.778 h1.2
  text "PA12" at 69.769,89.153 h1.2 r45
  text "+3V3" at 9.748,88.365 h1.2
  text "PA5" at 62.961,88.238 h1.2
  text "PF7" at 1.671,88.137 h1.2 r315
  text "PA11" at 69.489,86.41 h1.2 r45
  text "PA6" at 62.961,85.698 h1.2
  text "NRST" at 9.698,85.648 h1.2
  text "PA13" at 2.078,84.911 h1.2 r315
  text "PB12" at 69.591,83.895 h1.2 r45
  text "3V3" at 9.088,83.285 h1.2
  text "PA7" at 62.961,83.158 h1.2
  text "PA14" at 2.078,82.346 h1.2 r315
  text "PB11" at 69.642,81.38 h1.2 r45
  text "+5V" at 9.088,80.695 h1.2
  text "PB6" at 62.961,80.618 h1.2
  text "PA15" at 2.078,79.856 h1.2 r315
  text "GND" at 69.769,79.323 h1.2 r45
  text "GND" at 9.088,78.231 h1.2
  text "PC7" at 62.961,78.078 h1.2
  text "GND" at 1.671,78.053 h1.2 r315
  text "PB2" at 69.642,76.783 h1.2 r45
  text "GND" at 9.088,75.691 h1.2
  text "PA9" at 62.961,75.538 h1.2
  text "PB7" at 1.671,75.513 h1.2 r315
  text "PB1" at 69.489,74.065 h1.2 r45
  text "VIN" at 8.936,73.024 h1.2
  text "PA8" at 62.961,72.998 h1.2
  text "PC13" at 2.078,72.313 h1.2 r315
  text "PB15" at 69.591,71.373 h1.2 r45
  text "NC" at 8.466,70.704 h1.2
  text "PB10" at 62.961,70.458 h1.2
  text "PC14" at 2.078,69.696 h1.2 r315
  text "PB14" at 69.642,68.757 h1.2 r45
  text "PA0" at 9.088,68.096 h1.2
  text "PB4" at 62.961,67.918 h1.2
  text "PC15" at 1.9,67.36 h1.2 r315
  text "PB13" at 69.794,66.344 h1.2 r45
  text "PA1" at 8.783,65.505 h1.2
  text "PB5" at 62.961,65.378 h1.2
  text "OSCI" at 2.078,64.642 h1.2 r315
  text "AGND" at 69.86,64.007 h1.2 r45
  text "PA4" at 9.088,63.067 h1.2
  text "PB3" at 62.961,62.838 h1.2
  text "OSCO" at 2.078,62.102 h1.2 r315
  text "PC4" at 69.616,61.695 h1.2 r45
  text "PB0" at 9.088,60.425 h1.2
  text "PA10" at 62.961,60.298 h1.2
  text "VBAT" at 2.078,59.536 h1.2 r315
  text "NC" at 69.391,57.979 h1.2
  text "PC1" at 8.783,57.809 h1.2
  text "PA2" at 62.961,57.758 h1.2
  text "PC2" at 1.671,57.454 h1.2 r315
  text "NC" at 69.391,55.504 h1.2
  text "PC0" at 9.088,55.32 h1.2
  text "PA3" at 62.961,55.218 h1.2
  text "PC3" at 1.671,54.863 h1.2 r315
  text "PE8" at 69.616,53.847 h1.2 r45
  text "PD3" at 9.088,52.755 h1.2
  text "GND" at 62.961,52.678 h1.2
  text "PD4" at 1.595,52.628 h1.2 r315
  text "PF10" at 69.87,51.332 h1.2 r45
  text "NC" at 8.491,50.379 h1.2
  text "PD13" at 62.961,50.138 h1.2
  text "PD5" at 1.57,50.113 h1.2 r315
  text "PE7" at 69.667,48.716 h1.2 r45
  text "NC" at 8.516,47.904 h1.2
  text "PD6" at 1.57,47.598 h1.2 r315
  text "PD12" at 62.961,47.598 h1.2
  text "PD14" at 69.819,46.176 h1.2 r45
  text "PE2" at 9.088,45.16 h1.2
  text "PD7" at 1.519,45.135 h1.2 r315
  text "PD11" at 62.961,45.058 h1.2
  text "PD15" at 69.667,43.509 h1.2 r45
  text "PE4" at 9.088,42.747 h1.2
  text "PE3" at 1.544,42.544 h1.2 r315
  text "PE10" at 62.961,42.518 h1.2
  text "PF14" at 69.718,40.994 h1.2 r45
  text "GND" at 1.595,40.105 h1.2 r315
  text "PE12" at 62.961,39.978 h1.2
  text "PE5" at 9.088,39.928 h1.2
  text "PE9" at 69.667,38.556 h1.2 r45
  text "NC" at 1.966,37.729 h1.2
  text "NC" at 8.566,37.679 h1.2
  text "PE14" at 62.961,37.438 h1.2
  text "GND" at 69.667,36.041 h1.2 r45
  text "NC" at 2.016,35.179 h1.2
  text "PF8" at 9.088,35 h1.2
  text "PE15" at 62.961,34.898 h1.2
  text "PE11" at 69.794,33.578 h1.2 r45
  text "PF9" at 9.088,32.46 h1.2
  text "PD1" at 1.671,32.384 h1.2 r315
  text "PE13" at 62.961,32.358 h1.2
  text "NC" at 8.591,30.129 h1.2
  text "NC" at 62.941,30.054 h1.2
  text "NC" at 69.441,30.054 h1.2
  text "PD0" at 1.671,29.793 h1.2 r315
  text "PF15" at 69.819,28.32 h1.2 r45
  text "NC" at 1.916,27.554 h1.2
  text "GND" at 9.191,27.504 h1.2
  text "NC" at 62.991,27.479 h1.2
  text "PF11" at 69.642,25.704 h1.2 r45
  text "PE6" at 9.088,24.815 h1.2
  text "PG14" at 62.961,24.738 h1.2
  text "PE1" at 1.595,24.688 h1.2 r315
  text "PE0" at 69.667,23.468 h1.2 r45
  text "PG15" at 9.725,22.475 h1.2
  text "GND" at 62.961,22.198 h1.2
  text "PG9" at 1.62,22.097 h1.2 r315
  text "PG8" at 69.616,20.827 h1.2 r45
  text "PG10" at 9.829,19.887 h1.2
  text "PD10" at 62.961,19.658 h1.2
  text "PG12" at 2.078,18.871 h1.2 r315
  text "PG5" at 69.616,18.102 h1.2 r45
  text "PG7" at 62.975,17.4 h1.2
  text "NC" at 2.016,17.354 h1.2
  text "PG13" at 9.829,17.322 h1.2
  text "PG6" at 69.743,15.975 h1.2 r45
  text "PG11" at 9.829,14.909 h1.2
  text "PG4" at 62.841,14.754 h1.2
  text "PD9" at 1.671,14.477 h1.2 r315
  text "GND" at 5.975,10.075 h1.5
  text "GND" at 67,10.075 h1.5
Top Solder:
  region: 68.131,116.677 68.131,125.177 66.131,125.177 66.131,116.677
Bottom Solder:
  region: 68.131,116.677 68.131,125.177 66.131,125.177 66.131,116.677
M1-Board Shape:
  lines w0.1: 2,0 cw(c2,2) 0,2 0,131.34 cw(c2,131.34) 2,133.34 68,133.34 cw(c68,131.34) 70,131.34 70,2 cw(c68,2) 68,0 ; 51.369,0 68,0 ; 68,0 68,0
Drill Drawing:
  lines w0.127: -0.004,1.999 ccw(c1.996,1.999) 1.996,-0.001

## Dimensions
-3,120 to 2,133.34 on M2-Board Dimensions
0,131.34 to 70,131.34 on M2-Board Dimensions